# EAGLE board E-Piano-SM (EAGLE 9.4.0)
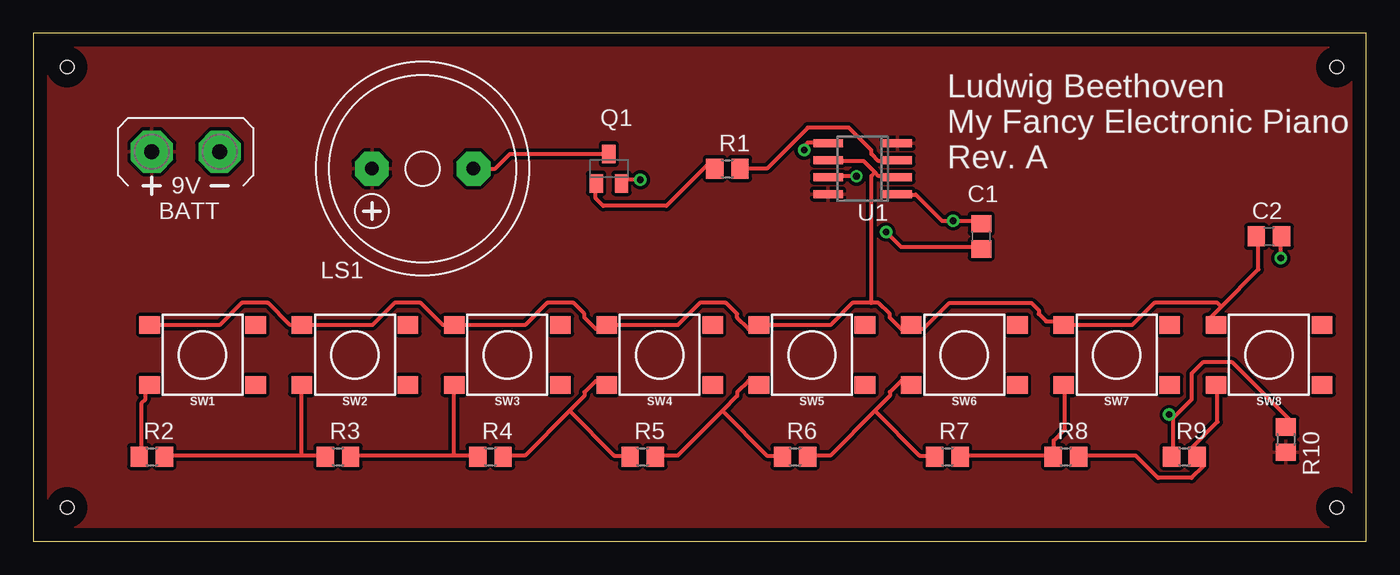
[diagram p0: board, top side]
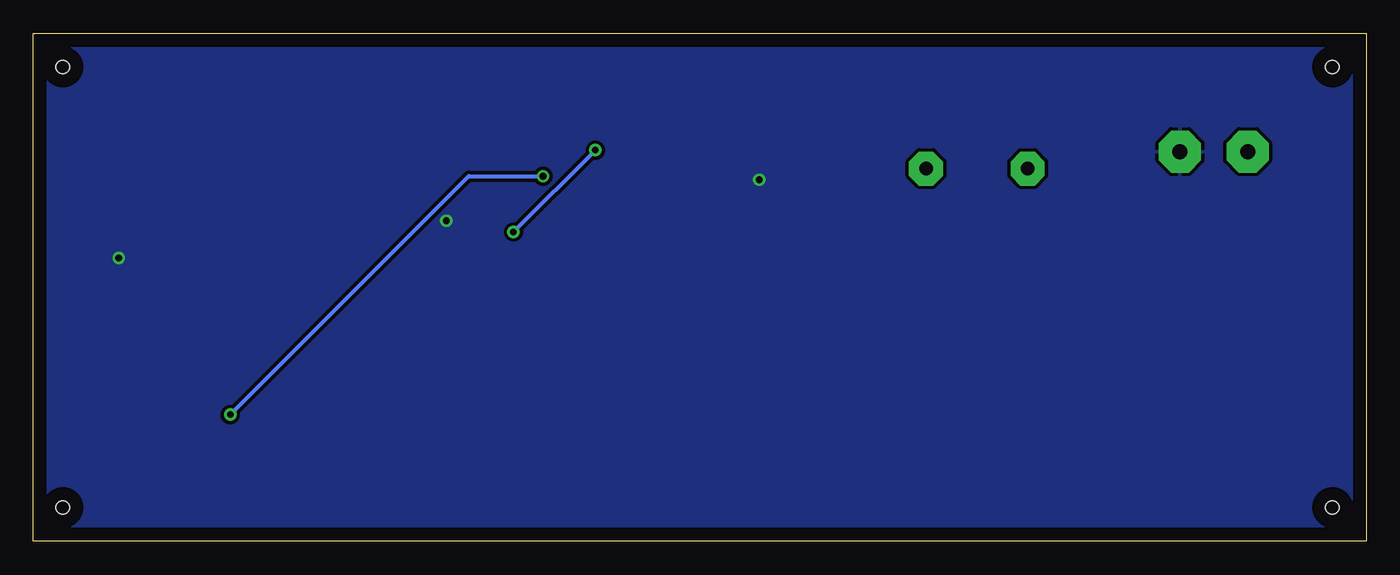
[diagram p1: board, bottom side, seen from below]

Size 100 x 38.09 mm. Coordinates in mm from the lower left corner, seen from the top.
Outline: 0,0 100,0 100,38.09 0,38.09 0,0
Copper layers (1*16): Top 0.035mm / dielectric 1.5mm / Bottom 0.035mm
Design rules "default": minimum track width 6mil, minimum drill 0.35mm, track to track 6mil, track to pad 6mil, pad to pad 6mil, via to via 6mil, smd to smd 6mil, copper to edge 40mil, drill to drill 6mil, minimum pad ring 10mil, minimum via ring 8mil, stop-mask expansion 4mil, vias tented up to drill 0mil, thermal gap 10mil
Net classes: 0 default: width 0.305 mm, drill 0.508 mm, clearance 0.254 mm
Holes 1 mm at 2.54,35.56 2.54,2.54 97.79,2.54 97.79,35.56

## Footprints (pad centres in the part's own frame; a part is rotated, then mirrored left to right if it is on the bottom)
AB9V = drill 1.118 pad 3.15 octagon: + 0,2.54; - 0,-2.54
C0805 = smd 1.3 x 1.5: 1 -0.95,0; 2 0.95,0
F/HMB = drill 1.016 pad 2.54 octagon: + 3.81,0; - -3.81,0
SOT23-BEC = smd 1 x 1.4: B -0.95,-1.1; C 0,1.1; E 0.95,-1.1
R0805 = smd 1.3 x 1.5: 1 -0.95,0; 2 0.95,0
TACTILE_SWITCH_SMD_6.2MM_TALL = smd 1.55 x 1.3: A1 -3.975,-2.25; A2 3.975,-2.25; B1 -3.975,2.25; B2 3.975,2.25
SO08 = smd 0.6 x 2.2: 1 -1.905,-2.6; 2 -0.635,-2.6; 3 0.635,-2.6; 4 1.905,-2.6; 5 1.905,2.6; 6 0.635,2.6; 7 -0.635,2.6; 8 -1.905,2.6

## Placement (x,y rotation side)
BATT  AB9V  [AB9V]  11.43,29.21 90 top
C1  0.1uF  [C0805]  71.12,22.86 90 top
C2  0.1uF  [C0805]  92.71,22.86 0 top
LS1  [F/HMB]  29.21,27.94 180 top
Q1  BCW66  [SOT23-BEC]  43.18,27.94 0 top
R1  1K  [R0805]  52.07,27.94 0 top
R2  1.5K  [R0805]  8.89,6.35 0 top
R3  1.3K  [R0805]  22.86,6.35 0 top
R4  620  [R0805]  34.29,6.35 0 top
R5  1.1K  [R0805]  45.72,6.35 0 top
R6  1K  [R0805]  57.15,6.35 0 top
R7  910  [R0805]  68.58,6.35 0 top
R8  390  [R0805]  77.47,6.35 0 top
R9  6.2K  [R0805]  86.36,6.35 0 top
R10  1K  [R0805]  93.98,7.62 270 top
SW1  MOMENTARY-SWITCH-SPST-SMD-6.2MM-TALL  [TACTILE_SWITCH_SMD_6.2MM_TALL]  12.7,13.97 180 top
SW2  MOMENTARY-SWITCH-SPST-SMD-6.2MM-TALL  [TACTILE_SWITCH_SMD_6.2MM_TALL]  24.13,13.97 180 top
SW3  MOMENTARY-SWITCH-SPST-SMD-6.2MM-TALL  [TACTILE_SWITCH_SMD_6.2MM_TALL]  35.56,13.97 180 top
SW4  MOMENTARY-SWITCH-SPST-SMD-6.2MM-TALL  [TACTILE_SWITCH_SMD_6.2MM_TALL]  46.99,13.97 180 top
SW5  MOMENTARY-SWITCH-SPST-SMD-6.2MM-TALL  [TACTILE_SWITCH_SMD_6.2MM_TALL]  58.42,13.97 180 top
SW6  MOMENTARY-SWITCH-SPST-SMD-6.2MM-TALL  [TACTILE_SWITCH_SMD_6.2MM_TALL]  69.85,13.97 180 top
SW7  MOMENTARY-SWITCH-SPST-SMD-6.2MM-TALL  [TACTILE_SWITCH_SMD_6.2MM_TALL]  81.28,13.97 180 top
SW8  MOMENTARY-SWITCH-SPST-SMD-6.2MM-TALL  [TACTILE_SWITCH_SMD_6.2MM_TALL]  92.71,13.97 180 top
U1  NE555D  [SO08]  62.23,27.94 90 top

## Library data of the parts
BATT = battery
C1 C2 = rcl; MOUSER#: 791-MT21B104K500CT; MPN: MT21B104K500CT; OC_NEWARK: unknown; SPICEPREFIX: C
LS1 = buzzer; MOUSER#: 665-AST-01508MR-R; OC_FARNELL: unknown; OC_NEWARK: unknown
Q1 = transistor; MF: INFINION TECHNOLOGIES; MOUSER#: 726-BCW66KHE6327HTSA; MPN: BCW66KHE6327HTSA1; OC_NEWARK: 58K2048
R1 R6 R10 = rcl; MOUSER#: 652-CR0805FX-1001ELF; MPN: CR0805FX-1001ELF; OC_NEWARK: unknown; SPICEPREFIX: R
R2 = rcl; MOUSER#: 652-CR0805FX-1501ELF; MPN: CR0805FX-1501ELF; OC_NEWARK: unknown; SPICEPREFIX: R
R3 = rcl; MOUSER#: 652-CR0805JW-132ELF; MPN: CR0805JW-132ELF; OC_NEWARK: unknown; SPICEPREFIX: R
R4 = rcl; MOUSER#: 652-CR0805JW-621ELF; MPN: CR0805JW-621ELF; OC_NEWARK: unknown; SPICEPREFIX: R
R5 = rcl; MOUSER#: 652-CR0805FX-1101ELF; MPN: CR0805FX-1101ELF; OC_NEWARK: unknown; SPICEPREFIX: R
R7 = rcl; MOUSER#: 652-CR0805FX-9100ELF; MPN: CR0805FX-9100ELF; OC_NEWARK: unknown; SPICEPREFIX: R
R8 = rcl; MOUSER#: 652-CR0805JW-391ELF; MPN: CR0805JW-391ELF; OC_NEWARK: unknown; SPICEPREFIX: R
R9 = rcl; MOUSER#: 652-CR0805FX-6201ELF; MPN: CR0805FX-6201ELF; OC_NEWARK: unknown; SPICEPREFIX: R
SW1-SW8 = SparkFun-Switches; MOUSER#: 653-B3F-1000; OC_NEWARK: unknown; PROD_ID: SWCH-11966; SF_SKU: COM-12992
U1 = linear; MOUSER#: 595-TLC555CDR; MPN: TLC555CDR; OC_NEWARK: 24M8296

## Nets
0: BATT.- C1.2 C2.2 Q1.E U1.1
N$1: R8.2 R9.2 SW8.B2
N$2: R9.1 R10.1 U1.7
N$3: R2.1 SW1.B2
N$4: R7.2 R8.1 SW7.B2
N$5: R6.2 R7.1 SW6.B2
N$6: R5.2 R6.1 SW5.B2
N$7: R4.2 R5.1 SW4.B2
N$8: R3.2 R4.1 SW3.B2
N$9: R2.2 R3.1 SW2.B2
N$11: R1.2 U1.3
N$12: C1.1 U1.5
N$13: LS1.- Q1.C
N$14: Q1.B R1.1
TR: C2.1 SW1.A2 SW2.A2 SW3.A2 SW4.A2 SW5.A2 SW6.A2 SW7.A2 SW8.A2 U1.2 U1.6
VCC: BATT.+ LS1.+ R10.2 U1.4 U1.8

## Tracks (layer width: path | path; a pad name or v marks a point on that pad's centre or on a via)
0  (via drill 0.51)
  Top 0.305: C1.2 70.97,24.03 v69.01,24.03 68.17,24.03 66.22,25.98 65.1,25.98 U1.1 | v45.54,27.1 44.15,27.1 Q1.E | v93.6,21.23 93.6,22.63 C2.2
  pour Bottom: -1.27,39.37 -1.27,-1.27 101.6,-1.27 101.6,39.37
N$1
  Top 0.305: R8.2 78.51,6.43 82.7,6.43 84.38,4.75 86.89,4.75 87.73,5.59 87.73,5.87 87.45,6.15 R9.2 87.17,6.43 86.89,6.71 86.89,6.99 88.85,8.94 88.85,11.46 SW8.B2
N$2  (via drill 0.51)
  Top 0.305: 85.5,9.22 85.5,6.43 R9.1 | 85.5,9.22 86.89,10.62 86.89,12.57 87.73,13.41 89.97,13.41 94.16,9.22 94.16,8.66 R10.1 | v61.75,27.38 59.79,27.38 U1.7 | 85.5,9.22 v85.22,9.5
  Bottom 0.305: v61.75,27.38 67.33,27.38 v85.22,9.5
N$3
  Top 0.305: R2.1 8.1,6.43 8.1,10.34 8.38,10.62 8.38,11.46 8.66,11.73 SW1.B2
N$4
  Top 0.305: R7.2 69.57,6.43 76.28,6.43 R8.1 76.56,6.43 76.56,7.54 77.39,8.38 77.39,11.46 SW7.B2
N$5
  Top 0.305: 63.14,9.78 64.26,10.9 64.26,11.18 65.1,12.01 65.38,12.01 65.66,11.73 SW6.B2 | 63.14,9.78 59.79,6.43 58.12,6.43 R6.2 | 63.14,9.78 66.5,6.43 67.61,6.43 R7.1
N$6
  Top 0.305: 51.69,9.78 52.81,10.9 52.81,11.18 53.65,12.01 53.92,12.01 54.2,11.73 SW5.B2 | 51.69,9.78 48.34,6.43 46.94,6.43 R5.2 | 51.69,9.78 55.04,6.43 56.16,6.43 R6.1
N$7
  Top 0.305: 40.23,9.78 41.35,10.9 41.35,11.18 42.19,12.01 42.47,12.01 42.75,11.73 SW4.B2 | 40.23,9.78 36.88,6.43 35.48,6.43 R4.2 | 40.23,9.78 43.59,6.43 44.7,6.43 R5.1
N$8
  Top 0.305: 31.57,6.43 33.25,6.43 R4.1 | 31.57,6.43 24.03,6.43 R3.2 | 31.57,6.43 31.57,11.46 SW3.B2
N$9
  Top 0.305: 20.12,6.43 21.79,6.43 R3.1 | 20.12,6.43 10.06,6.43 R2.2 | 20.12,6.43 20.12,11.46 SW2.B2
N$11
  Top 0.305: R1.2 55.04,27.94 58.12,31.01 61.19,31.01 62.87,29.34 62.87,29.06 63.42,28.5 64.82,28.5 U1.3
N$12  (via drill 0.51)
  Top 0.305: v63.98,23.19 65.1,22.07 70.97,22.07 C1.1 | v57.84,29.34 57.84,29.62 58.12,29.9 59.51,29.9 U1.5
  Bottom 0.305: v57.84,29.34 v63.98,23.19
N$13
  Top 0.305: LS1.- 34.65,27.94 35.76,29.06 43.03,29.06 Q1.C
N$14
  Top 0.305: Q1.B 42.19,26.82 42.19,25.7 42.75,25.15 47.5,25.15 50.57,28.22 50.85,28.22 R1.1
TR
  Top 0.305: SW1.A2 8.94,16.2 13.97,16.2 15.65,17.88 17.6,17.88 19.28,16.2 20.12,16.2 SW2.A2 20.4,16.2 25.43,16.2 27.1,17.88 29.06,17.88 30.73,16.2 31.57,16.2 SW3.A2 31.85,16.2 36.88,16.2 38.56,17.88 40.51,17.88 41.35,17.04 41.35,16.76 42.19,15.93 42.47,15.93 42.75,16.2 SW4.A2 43.03,16.2 48.34,16.2 50.01,17.88 51.97,17.88 52.81,17.04 52.81,16.76 53.65,15.93 53.92,15.93 54.2,16.2 SW5.A2 54.48,16.2 59.79,16.2 61.47,17.88 62.87,17.88 | 89.13,17.6 88.29,16.76 88.29,16.48 88.57,16.2 SW8.A2 | 89.13,17.6 91.92,20.4 91.92,22.63 C2.1 | 89.13,17.6 88.85,17.88 84.1,17.88 82.42,16.2 77.39,16.2 SW7.A2 77.11,16.48 76,16.48 75.44,17.04 75.44,17.32 74.88,17.88 68.73,17.88 66.78,15.93 66.22,15.93 65.94,16.2 SW6.A2 65.66,16.2 65.38,15.93 65.1,15.93 64.26,16.76 64.26,17.04 63.42,17.88 62.87,17.88 | 63.14,27.66 63.42,27.38 64.82,27.38 U1.2 | 63.14,27.66 62.31,28.5 59.79,28.5 U1.6 | 63.14,27.66 62.87,27.38 62.87,17.88
VCC
  pour Top: -1.27,39.37 -1.27,-1.27 100.33,-1.27 101.6,-1.27 101.6,39.37

## Text on the board
tNames: Ludwig Beethoven / My Fancy Electronic Piano / Rev. A